# Altium PCB PCB7_main_board.PcbDoc (part 1 of 3)
Units mm, origin at the board's own origin, x right, y up, seen from the top; angles counter-clockwise.
Board outline 169 x 112 mm, 2 copper layers (Top Layer, Bottom Layer); 275 components, 203 nets, 880 pads, 376 vias.
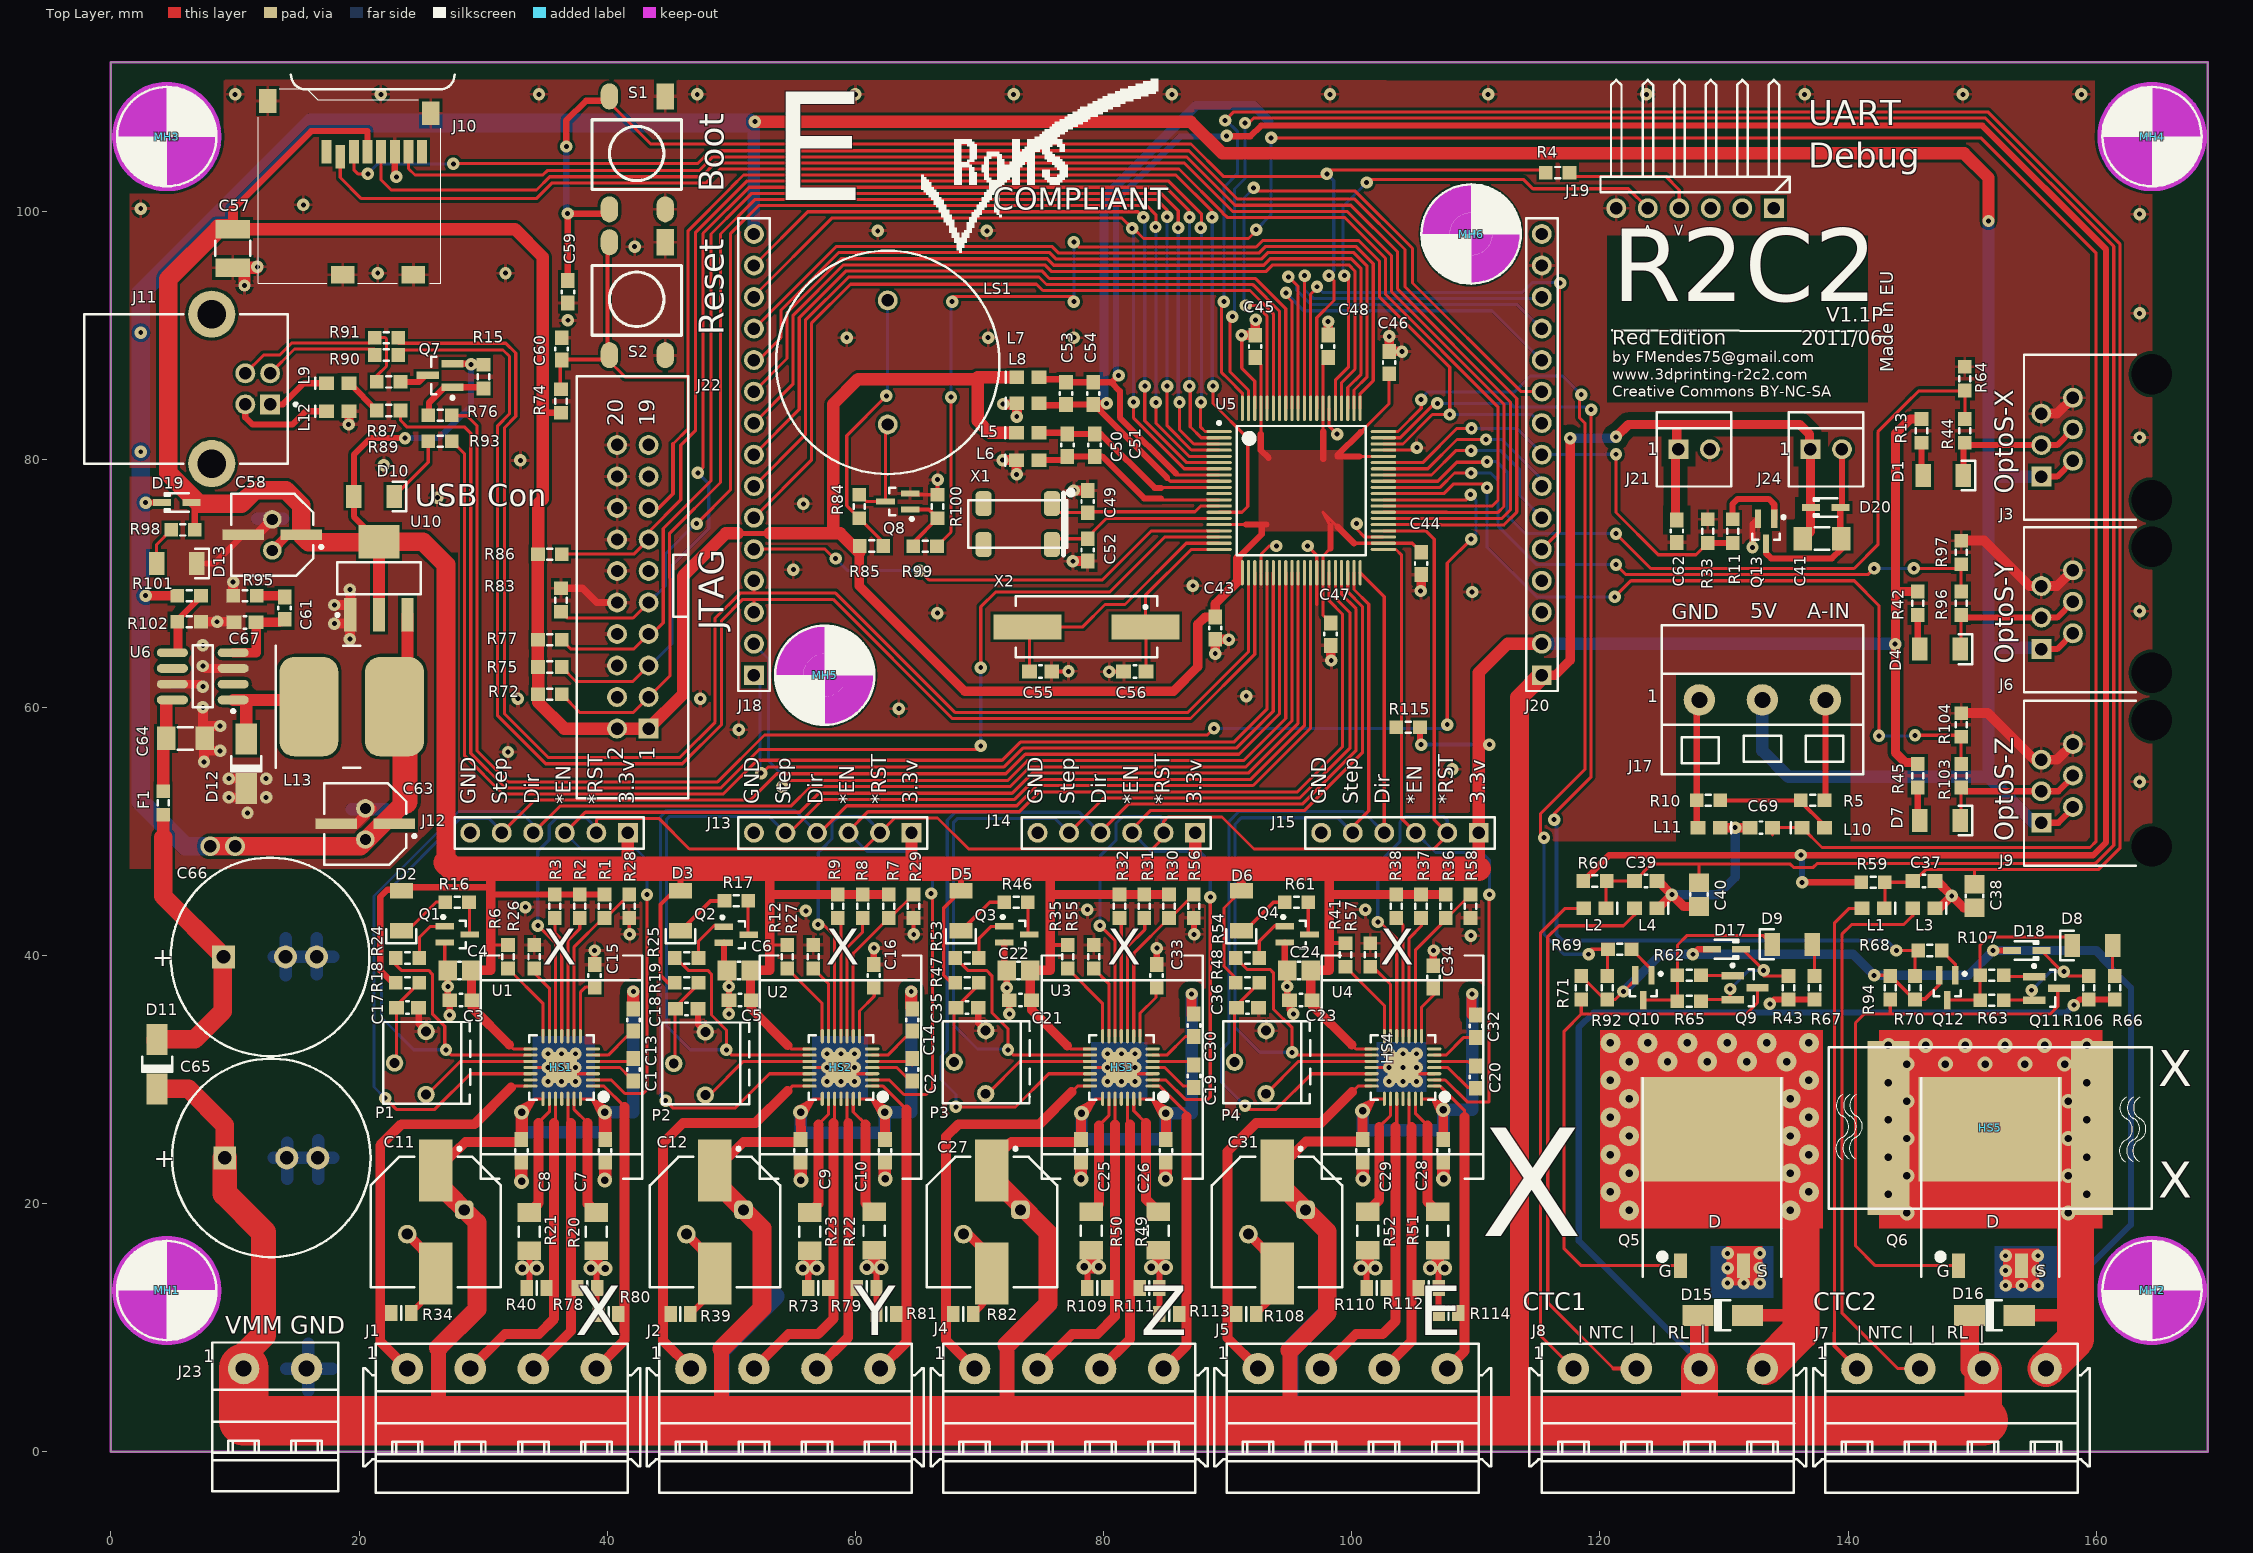
[diagram p0: Top Layer view]
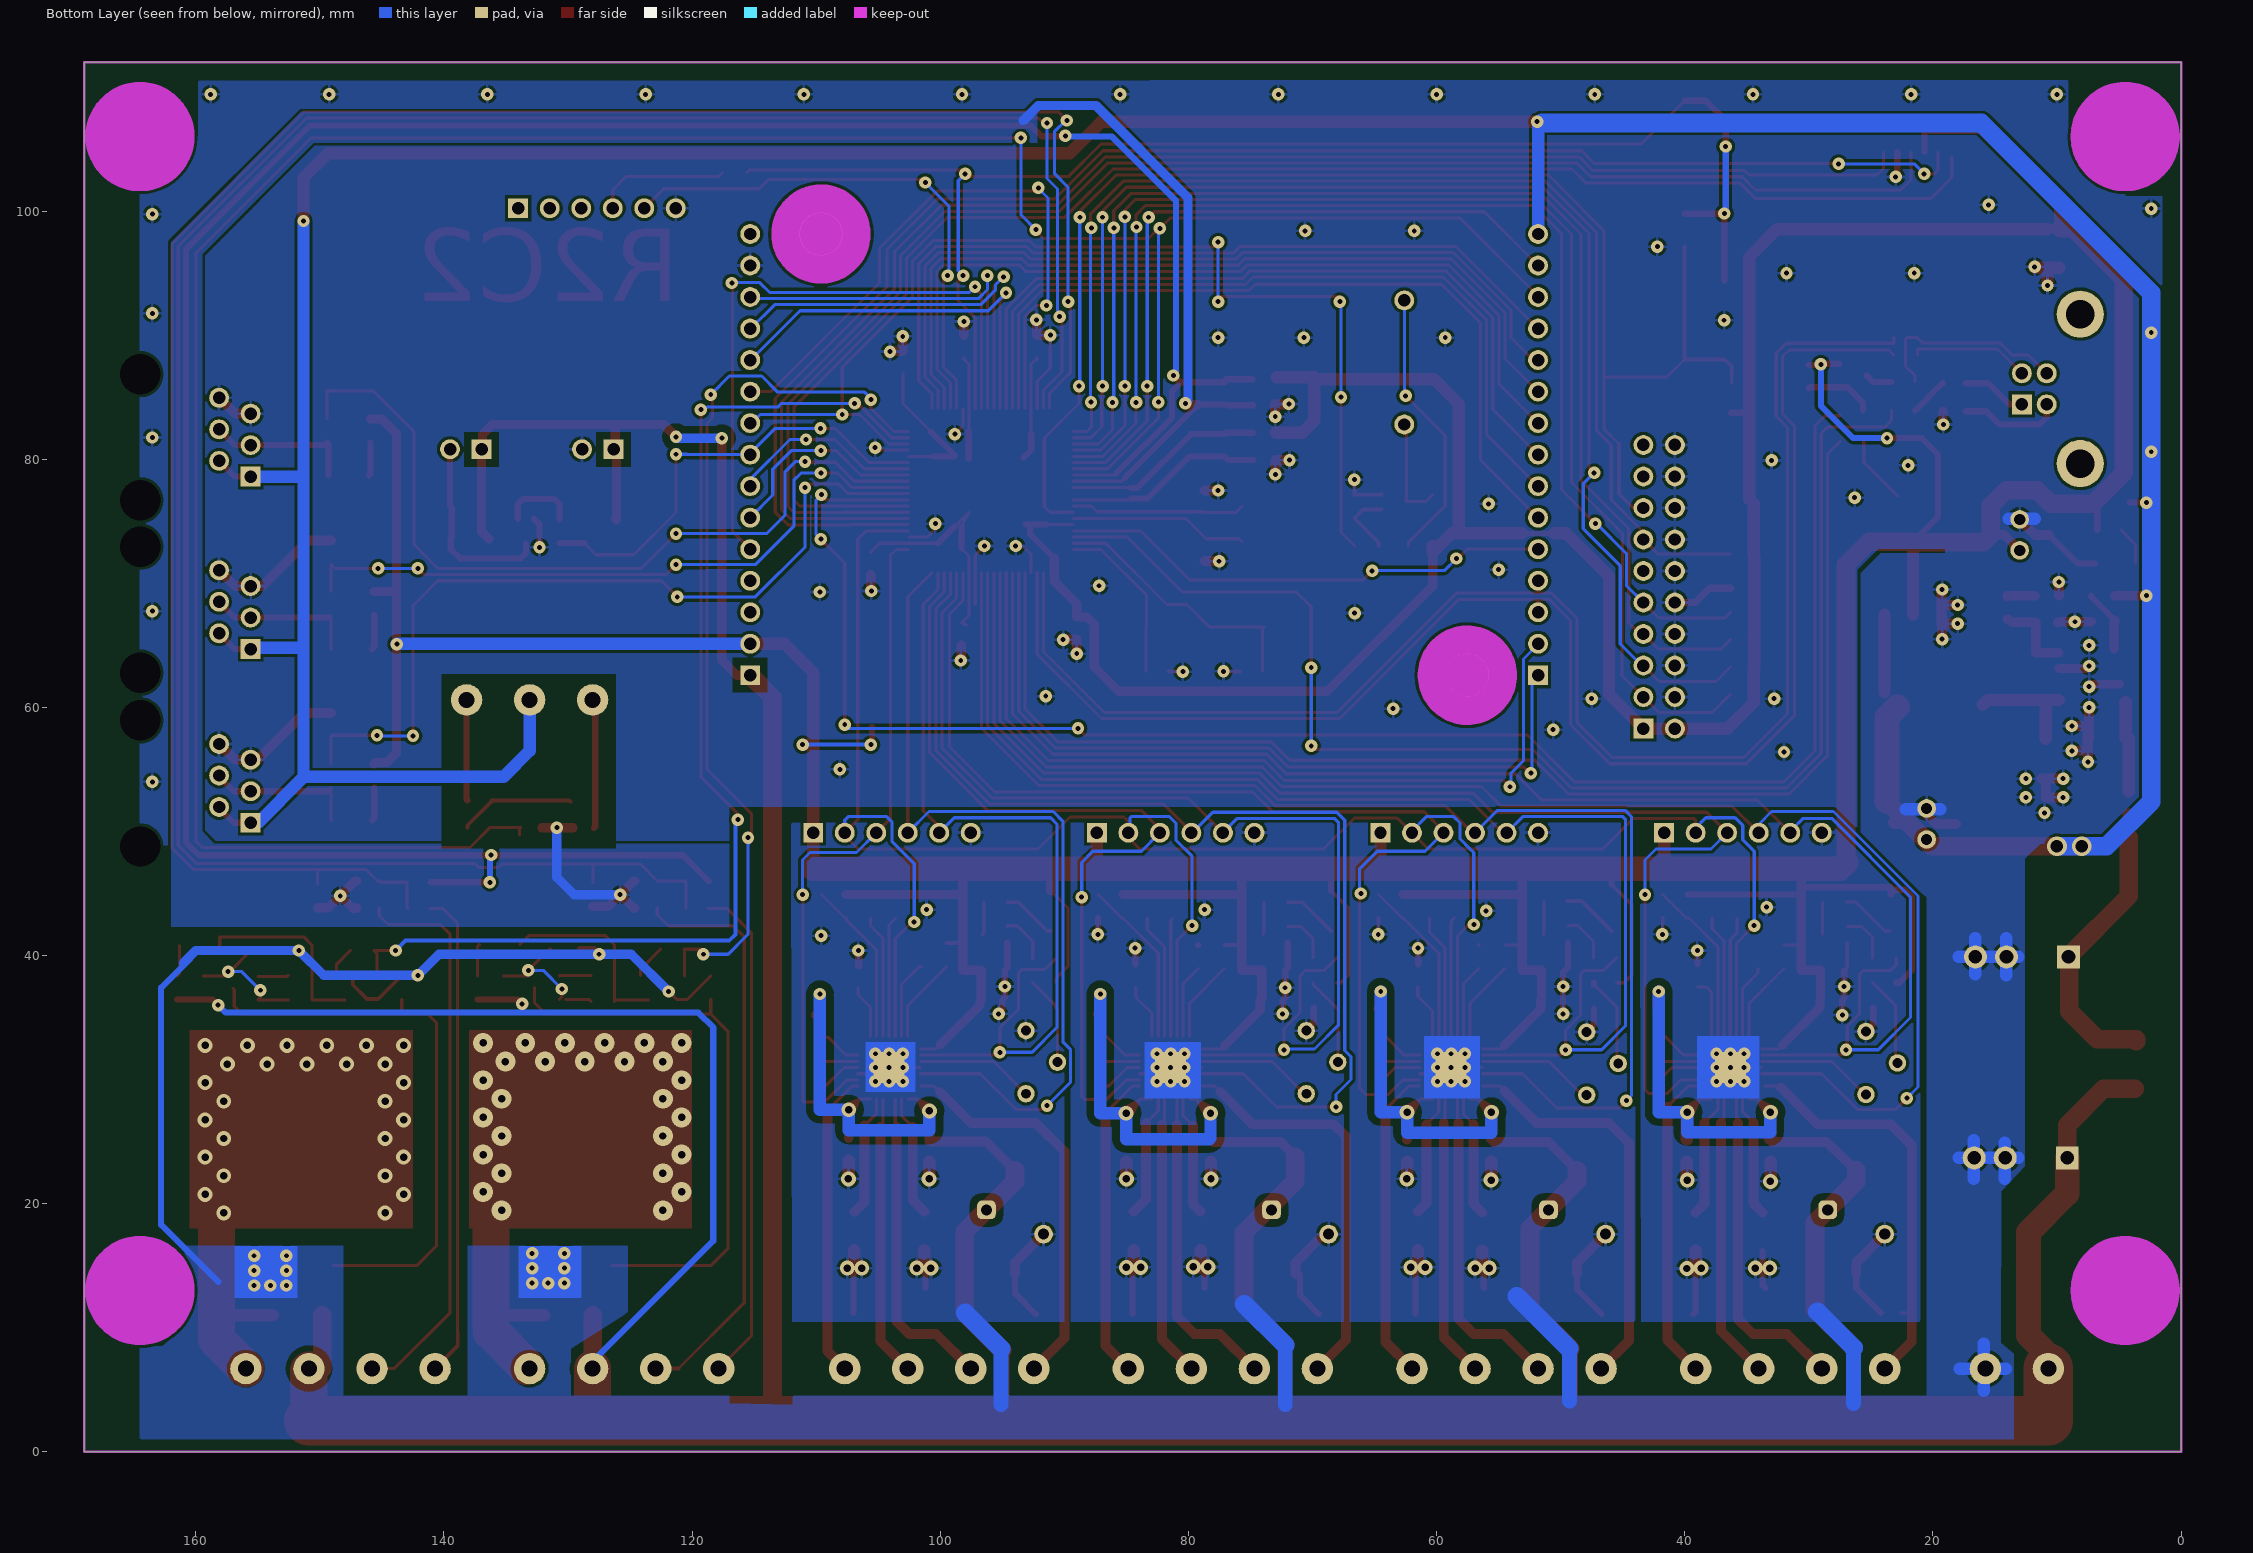
[diagram p1: Bottom Layer view, seen from below]

## Layer stack, top to bottom
Top Layer: signal copper 0.0356
Dielectric: core 0.32, FR-4, Dk 4.8
Bottom Layer: signal copper 0.0356

## Board outline
0,0 0,112 169,112 169,0

## Design rules (kind name [scope] priority, off if disabled: settings)
AssemblyTestPointUsage [All] p1 off:
AssemblyTestpoint [All] p1 off: testpointundercomponent=TRUE minsize=1.016 maxsize=2.54 preferedsize=1.524 minholesize=0 maxholesize=1.016 preferedholesize=0.813 testpointgrid=0.025 usegrid=TRUE gridtolerance=0 allowsidetop=TRUE allowsidebottom=TRUE
Clearance Clearance_1 [InNamedPolygon('Bottom_GND_USB_exeption') vs InNet('GND')] p1 off: gap=0.25
Clearance Clearance_VMM3 [InNet('NetD15_2') vs InNet('GND')] p2 off: gap=0.6
Clearance Clearance_VMM2 [InNet('NetD16_2') vs InNet('GND')] p3 off: gap=0.6
Clearance Clearance_3 [InNet('USB_D_P') vs (InNet('GND') AND OnLayer('Top Layer') AND (NOT (IsPad AND InNet('GND'))) AND (NOT(InNet('GND') AND IsTrack)))] p4 off: gap=0.76
Clearance Clearance_2 [InNet('USB_D_N') vs (InNet('GND') AND OnLayer('Top Layer') AND (NOT (IsPad AND InNet('GND'))) AND (NOT(InNet('GND') AND IsTrack)))] p5 off: gap=0.76
Clearance Clearance_VMM [InNet('VMM') vs (InNet('GND') AND (NOT (IsVia AND InNet('GND'))))] p6: gap=0.59
Clearance [All] p7: gap=0.24
ComponentClearance [All] p1 off: gap=0.254 collisioncheckmode=3 verticalgap=0.254 showdistances=FALSE
DiffPairsRouting DiffPair_USB2DiffPairsRouting [InDifferentialPair ('USB_D')] p1 off: maxlimit=0.254 minlimit=0.254 mostfreqgap=0.254 maxuncoupledlength=12.7
FabricationTestPointUsage [All] p1 off: valid=0 allowmultiple=FALSE
FabricationTestpoint [All] p1 off: side=3 testpointundercomponent=TRUE minsize=1.016 maxsize=2.54 preferedsize=1.524 minholesize=0 maxholesize=1.016 preferedholesize=0.813 testpointgrid=0.025 allowsidetop=TRUE allowsidebottom=TRUE usegrid=TRUE gridtolerance=0
FanoutControl Fanout_BGA [IsBGA] p1 off: bgadir=Out bgaviamode=Centered fanoutstyle=Auto fanoutdirection=Alternating viagrid=0.025 // Fanout_BGA (Default Rule)
FanoutControl Fanout_LCC [IsLCC] p2 off: bgadir=Out bgaviamode=Centered fanoutstyle=Auto fanoutdirection=Alternating viagrid=0.025 // Fanout_LCC (Default Rule)
FanoutControl Fanout_SOIC [IsSOIC] p3 off: bgadir=Out bgaviamode=Centered fanoutstyle=Auto fanoutdirection=Alternating viagrid=0.025 // Fanout_SOIC (Default Rule)
FanoutControl Fanout_Small [(CompPinCount < 5)] p4 off: bgadir=Out bgaviamode=Centered fanoutstyle=Auto fanoutdirection=OutThenIn viagrid=0.025 // Fanout_Small (Default Rule)
FanoutControl Fanout_Default [All] p5 off: bgadir=Out bgaviamode=Centered fanoutstyle=Auto fanoutdirection=Alternating viagrid=0.025 // Fanout_Default (Default Rule)
Height [All] p1 off: minheight=0 maxheight=30 prefheight=12.7
HoleSize [All] p1 off: absolutevalues=TRUE maxlimit=5.08 minlimit=0.4 maxpercent=80.000 minpercent=20.000
HoleToHoleClearance [All] p1 off: gap=0.254 allowstackedmicrovias=TRUE
LayerPairs [All] p1 off: enforce=TRUE
MatchedLengths DiffPair_USBMatchedLengths [InDifferentialPair ('USB_D')] p1 off: tolerance=2.54 checknetsindiffpair=TRUE checkdiffpairvsdiffpair=TRUE checkothers=TRUE
MaximumViaCount [All] p1 off: limit=300
MinimumAnnularRing [All] p1 off: minimumring=0.3
MinimumSolderMaskSliver [All] p1 off: minsoldermaskwidth=0.254
NetAntennae [All] p1 off: netantennaetolerance=0
NetsToIgnore [(InNet('V3.3') OR InNet('VA3.3') OR InNet('VMM'))] p1 off:
PasteMaskExpansion [All] p1 off: expansion=-0.1
PlaneClearance [All] p1 off: clearance=0.508
PlaneConnect [All] p1 off: planeconnectstyle=Relief reliefexpansion=0.508 reliefentries=4 reliefconductorwidth=0.3 reliefairgap=0.254
PolygonConnect No_Thermal-relif [All vs IsNamedPolygon('Bottom_GND_DCDC')] p1: connectstyle=Direct reliefconductorwidth=0.254 reliefentries=4 polygonreliefangle="90 Angle"
PolygonConnect PolygonConnect_2 [All vs IsNamedPolygon('Bottom_GND_DCDC')] p2 off: connectstyle=Direct reliefconductorwidth=0.254 reliefentries=4 polygonreliefangle="90 Angle"
PolygonConnect PolygonConnect_1 [All vs IsNamedPolygon('Bottom_GND_HeatSink')] p3 off: connectstyle=Direct reliefconductorwidth=0.254 reliefentries=4 polygonreliefangle="90 Angle"
PolygonConnect [All] p4 off: connectstyle=Relief reliefconductorwidth=0.254 reliefentries=4 polygonreliefangle="90 Angle"
RoomDefinition Sheet_1 [InComponentClass('Sheet_1')] p1 off: confinementstyle=ConfineIn formatcopy=TRUE lockcomponents=FALSE outline 172.6,0.8 203,0.8 203,6.3 172.6,6.3
RoomDefinition Sheet_2 [InComponentClass('Sheet_2')] p2 off: confinementstyle=ConfineIn formatcopy=TRUE lockcomponents=FALSE outline 172.8,11.4 203,11.4 203,7.8 172.8,7.8
RoutingCorners [All] p1 off: cornerstyle=45-Degree minsetback=2.54 maxsetback=2.54
RoutingLayers [All] p1 off: top layer_v5=TRUE bottom layer_v5=TRUE
RoutingPriority [All] p1 off: routingpriority=0
RoutingTopology [All] p1 off: topology=Shortest
RoutingVias [All] p1 off: holewidth=0.4 width=1 viastyle="Through Hole" minholewidth=0.4 minwidth=1 maxholewidth=1.6 maxwidth=2
SMDNeckDown [All] p1 off: percent=80.000
ShortCircuit [All] p1 off: allowed=FALSE
SilkToSilkClearance [All] p1 off: silktosilkclearance=0.254
SilkscreenOverComponentPads [All] p1 off: minsilkscreentomaskgap=0.254
SolderMaskExpansion [All] p1 off: expansion=0.1
Width DiffPair_Width [InDifferentialPair('USB_D')] p1 off: maxlimit=0.254 minlimit=0.24 preferedwidth=0.254
Width [All] p2: maxlimit=5 minlimit=0.24 preferedwidth=0.25 checkconnectedcopper=TRUE
1 further rules are at their usual default settings.

## Classes and differential pairs
component class Sheet_2: C28 C33 C35 C36 C41 C43 C44 C45 C46 C47 C49 C50 C51 C52 C54 C57 C58 C59 C60 C61 C63 C64 C65 C66 C67 D10 D11 D12 D13 D19 D20 F1 J10 J11 J18 J19 J20 J22 J23 J24 L5 L6 L7 L8 L9 L12 L13 LS1 MH1 MH2 MH3 MH4 MH5 MH6 Q7 Q8 Q13 R4 R11 R15 R33 R72 R74 R75 R76 R77 R83 R84 R85 R86 R87 R89 R90 R91 R93 R95 R98 R99 R100 R101 R102 R115 S1 S2 U5 U6 U10 X1 X2
component class Sheet_1: C1 C2 C3 C4 C5 C6 C7 C8 C9 C10 C11 C12 C13 C14 C15 C16 C17 C18 C19 C20 C21 C22 C23 C24 C25 C26 C27 C28 C29 C30 C31 C32 C33 C34 C35 C36 C37 C38 C39 C40 C42 C62 C68 C69 C70 D1 D2 D3 D4 D5 D6 D7 D8 D9 D14 D15 D16 D17 D18 HS1 HS2 HS3 HS4 HS5 J1 J2 J3 J4 J5 J6 J7 J8 J9 J12 J13 J14 J15 J16 J17 J21 L1 L2 L3 L4 L10 L11 MH7 P1 P2 P3 P4 Q1 Q2 Q3 Q4 Q5 Q6 Q9 Q10 Q11 Q12 R1 R2 R3 R5 R6 R7 R8 R9 R10 R12 R13 R14 R16 R17 R18 R19 R20 R21 R22 R23 R24 R25 R26 R27 R28 R29 R30 R31 R32 R34 R35 R36 R37 R38 R39 R40 R41 R42 R43 R44 R45 R46 R47 R48 R49 R50 R51 R52 R53 R54 R55 R56 R57 R58 R59 R60 R61 R62 R63 R64 R65 R66 R67 R68 R69 R70 R71 R73 R78 R79 R80 R81 R82 R88 R92 R94 R96 R97 R103 R104 R105 R106 R107 R108 R109 R110 R111 R112 R113 R114 R? U1 U2 U3 U4 U7 U8
differential pair USB_D: +USB_D_P -USB_D_N

## Components (designator, comment, footprint, x,y, rotation, side; value= is the part's Value field where it differs from the comment)
C1 "100nF" CAPC1608M 42.1,30.8 r270 top locked
C2 "100nF" CAPC1608M 64.578,30.8 r90 top
C3 "100nF" CAPC1608M 28.2,36.4 r0 top locked
C4 "10uF 6.3V" CAPC2012M 28.1,38.8 r0 top locked
C5 "100nF" CAPC1608M 50.7,36.4 r0 top
C6 "10uF 6.3V" CAPC2012M 50.6,38.8 r0 top
C7 "100nF" CAPC1608M 39.828,24.27 r270 top locked
C8 "100nF" CAPC1608M 33.078,24.27 r90 top locked
C9 "100nF" CAPC1608M 55.578,24.27 r90 top
C10 "100nF" CAPC1608M 62.378,24.27 r90 top
C11 "100uF 50V" CAPAE100X100M 26.178,18.52 r270 top locked
C12 "100uF 50V" CAPAE100X100M 48.678,18.52 r270 top
C13 "100nF" CAPC1608M 42.1,34.8 r90 top locked
C14 "100nF" CAPC1608M 64.578,34.8 r90 top
C15 "220nF" CAPC1608M 38.978,38.37 r270 top locked
C16 "220nF" CAPC1608M 61.478,38.37 r270 top
C17 "100nF" CAPC1608M 23.9,35.8 r180 top locked
C18 "100nF" CAPC1608M 46.4,35.7 r0 top
C19 "100nF" CAPC1608M 87.278,30.27 r270 top
C20 "100nF" CAPC1608M 110,30.2 r90 top
C21 "100nF" CAPC1608M 73.3,36.4 r0 top
C22 "10uF 6.3V" CAPC2012M 73.15,38.8 r0 top
C23 "100nF" CAPC1608M 95.9,36.4 r0 top
C24 "10uF 6.3V" CAPC2012M 95.75,38.8 r0 top
C25 "100nF" CAPC1608M 78.178,24.27 r90 top
C26 "100nF" CAPC1608M 85.02,24.27 r90 top
C27 "100uF 50V" CAPAE100X100M 71,18.52 r270 top
C28 "100nF" CAPC1608M 107.378,24.27 r90 top
C29 "100nF" CAPC1608M 100.878,24.27 r90 top
C30 "100nF" CAPC1608M 87.278,34.37 r90 top
C31 "100uF 50V" CAPAE100X100M 93.978,18.52 r270 top
C32 "100nF" CAPC1608M 110,34.3 r90 top
C33 "220nF" CAPC1608M 84.278,38.37 r270 top
C34 "220nF" CAPC1608M 106.578,38.27 r270 top
C35 "100nF" CAPC1608M 69,35.8 r180 top
C36 "100nF" CAPC1608M 91.6,35.8 r180 top
C37 "100nF" CAPC1608M 146.12,46 r180 top
C38 "10uF 6.3V" CAPC2012M 150.2,44.8 r90 top
C39 "100nF" CAPC1608M 123.7,46 r180 top
C40 "10uF 6.3V" CAPC2012M 128,44.9 r90 top
C41 "10uF 35V" CAPC3216M 137.9,73.6 r180 top
C43 "100nF" CAPC1608M 89,66.388 r90 top
C44 "100nF" CAPC1608M 105.6,71.6 r90 top
C45 "100nF" CAPC1608M 92.22,89.088 r90 top
C46 "100nF" CAPC1608M 103.02,87.788 r90 top
C47 "100nF" CAPC1608M 98.3,65.9 r270 top
C48 "100nF" CAPC1608M 98.1,89.1 r90 top
C49 "22pF" CAPC1608M 78.72,76.588 r90 top
C50 "1nF" CAPC1608M 77.082,81.126 r90 top
C51 "10nF" CAPC1608M 79.282,81.126 r90 top
C52 "22pF" CAPC1608M 78.72,72.688 r270 top
C53 "1nF" CAPC1608M 76.968,85.3 r90 top
C54 "10nF" CAPC1608M 79.168,85.3 r90 top
C55 "22pF" CAPC1608M 74.92,62.888 r0 top
C56 "22pF" CAPC1608M 82.52,62.888 r180 top
C57 "47uF 6.3V" CAPC3225M 9.82,96.988 r90 top
C58 "100uF 10V" CAPAE6666X54M#1 13,73.9 r180 top
C59 "100nF" CAPC1608M 36.82,93.488 r90 top
C60 "100nF" CAPC1608M 36.32,88.888 r270 top
C61 "22nF" CAPC1608M 14,68 r270 top
C62 "100nF" CAPC1608M 126.2,74.2 r90 top
C63 "100uF 10V" CAPAE6666X54M#2 20.5,50.6 r180 top
C64 "10uF 35V" CAPC3216M 6,57.5 r180 top
C65 "2200uF 35V" CAPPR7.5-16X25 12.92,23.688 r0 top
C66 "2200uF 35V" CAPPR7.5-16X25 12.82,39.888 r0 top
C67 "220pF" CAPC1608M 10.8,66.85 r0 top
C69 "100nF" CAPC1608M 133,50.3 r0 top
D1 "Green" LEDM_3216X12M 147.67,78.688 r180 top
D2 "Red" LEDM_3216X12M 23.4,43.6 r90 top locked
D3 "Red" LEDM_3216X12M 45.9,43.6 r90 top
D4 "Green" LEDM_3216X12M 147.42,64.688 r180 top
D5 "Red" LEDM_3216X12M 68.5,43.6 r90 top
D6 "Red" LEDM_3216X12M 91.1,43.6 r90 top
D7 "Green" LEDM_3216X12M 147.42,50.888 r180 top
D8 "Red" LEDM_3216X12M 159.7,40.8 r0 top
D9 "Red" LEDM_3216X12M 135.5,40.9 r0 top
D10 "Blue" LEDM_3216X12M 21.2,77 r180 top
D11 "60V@1.5A" SMA 3.72,31.248 r90 top
D12 "25V@2A" SMB 10.9,55.45 r90 top
D13 "Orange" LEDM_3216X12M 5.3,71.6 r180 top
D15 "60V@1.5A" SMA 129.9,11 r0 top
D16 "60V@1.5A" SMA 151.8,11 r0 top
D17 "12V" SOD323 130.2,40.5 r180 top
D18 "12V" SOD323 154.4,40.4 r180 top
D19 "1A@30V" SOD323 5.3,76.5 r0 top
D20 "1A@30V" SOD323 138.2,76.1 r0 top
F1 "3.15A" RESC1608M 4.2,52.3 r90 top
HS1 "Mec_Heat_Sink" HS_180X130X50 36.3,31 r90 top locked
HS2 "Mec_Heat_Sink" HS_180X130X50 58.8,31 r90 top locked
HS3 "Mec_Heat_Sink" HS_180X130X50 81.5,31 r90 top locked
HS4 "Mec_Heat_Sink" HS_180X130X50 104.1,31 r90 top locked
HS5 "Mec_Heat_Sink" FK_244_13_D2PAK 151.46,26.1 r180 top
J1 "Con 4" WEIDMULLER_SL-5.08-04-90B 31.5,6.708 r0 top locked
J2 "Con 4" WEIDMULLER_SL-5.08-04-90B 54.36,6.708 r0 top locked
J3 "RJ11" MOLEX_95022-2667 160.028,81.77 r90 top
J4 "Con 4" WEIDMULLER_SL-5.08-04-90B 77.22,6.708 r0 top locked
J5 "Con 4" WEIDMULLER_SL-5.08-04-90B 100.08,6.708 r0 top locked
J6 "RJ11" MOLEX_95022-2667 160.028,67.87 r90 top
J7 "Con 4" WEIDMULLER_SL-5.08-04-90B 148.34,6.708 r0 top locked
J8 "Con 4" WEIDMULLER_SL-5.08-04-90B 125.48,6.708 r0 top locked
J9 "RJ11" MOLEX_95022-2667 160.028,53.87 r90 top
J10 "uSD" 3M_2900 19.203,101.87 r0 top locked
J11 "Con 4 USB" USB2.5-2H4D 11.828,85.67 r180 top locked
J12 "HDR1X6H" HDR1X6 41.66,49.888 r180 top locked
J13 "HDR1X6H" HDR1X6 64.52,49.888 r180 top locked
J14 "HDR1X6H" HDR1X6 87.38,49.888 r180 top locked
J15 "HDR1X6H" HDR1X6 110.24,49.888 r180 top locked
J17 "Con 3" phoenix-contact_smkdsn-5.08 133.1,60.6 r0 top
J18 "Con 15" HDR1X15 51.82,62.588 r90 top
J19 "HDR1X6H" HDR1X6H 134.02,100.228 r180 top
J20 "Con 15" HDR1X15 115.32,62.588 r90 top
J21 "Con 2" MOLEX_22-29-2021 127.6,80.8 r0 top
J22 "2x10x2.54mm" HDR2X10 43.33,58.288 r90 top
J23 "Con 2" WEIDMULLER_SL-5.08-02-90B 13.228,6.708 r0 top locked
J24 "Con 2" MOLEX_22-29-2021 138.24,80.8 r0 top
L1 "470R@100Mhz" INDC1608M 142.02,43.8 r180 top
L2 "470R@100Mhz" INDC1608M 119.6,43.8 r180 top
L3 "470R@100Mhz" INDC1608M 146.12,43.8 r180 top
L4 "470R@100Mhz" INDC1608M 123.7,43.8 r180 top
L5 "470R@100Mhz" INDC1608M 73.882,82.126 r0 top
L6 "470R@100Mhz" INDC1608M 73.882,79.926 r0 top
L7 "470R@100Mhz" INDC1608M 73.9,86.6 r0 top
L8 "470R@100Mhz" INDC1608M 73.9,84.5 r0 top
L9 "470R@100Mhz" INDC1608M 18.278,86.12 r0 top
L10 "470R@100Mhz" INDC1608M 137.2,50.3 r0 top
L11 "470R@100Mhz" INDC1608M 128.8,50.3 r180 top
L12 "470R@100Mhz" INDC1608M 18.278,83.87 r0 top
L13 "33uH 1.5Adc" INDP9898X58M 19.4,60.05 r0 top
LS1 "Buzzer" TDK_PS17 62.6,92.8 r270 top
MH1 "MH" MH_M3 4.5,13 r0 top locked
MH2 "MH" MH_M3 164.5,13 r90 top locked
MH3 "MH" MH_M3 4.5,106 r90 top locked
MH4 "MH" MH_M3 164.5,106 r0 top locked
MH5 "MH" MH_M3_2 57.52,62.588 r270 top locked
MH6 "MH" MH_M3_2 109.62,98.148 r90 top locked
P1 "10k" TRIMMER_14 25.4,31.34 r270 top locked
P2 "10k" TRIMMER_14 47.9,31.3 r270 top
P3 "10k" TRIMMER_14 70.5,31.4 r270 top
P4 "10k" TRIMMER_14 93.1,31.4 r270 top
Q1 "N" SOT323-3AM 27.9,41.7 r0 top locked
Q2 "N" SOT323-3AM 50.4,41.67 r0 top
Q3 "N" SOT323-3AM 73,41.7 r0 top
Q4 "N" SOT323-3AM 95.6,41.7 r0 top
Q5 "N" D2PAK 129.04,26 r0 top
Q6 "N" D2PAK 151.46,26 r0 top
Q7 "P" SOT23-3M 26.52,86.748 r180 top
Q8 "N" SOT323-3AM 63.42,76.588 r180 top
Q9 "P" SOT23-3M 131.7,37.4 r0 top
Q10 "N" SOT323-3AM 123.5,37.4 r270 top
Q11 "P" SOT23-3M 156,37.35 r0 top
Q12 "N" SOT323-3AM 148,37.4 r270 top
Q13 "N" SOT323-3AM 133.4,74.2 r270 top
R1 "10K" RESC1608M 39.778,43.97 r90 top locked
R2 "10K" RESC1608M 37.778,43.97 r90 top locked
R3 "10K" RESC1608M 35.778,43.97 r90 top locked
R4 "1K5" RESC1608M 116.6,103.1 r0 top
R5 "6K8" RESC1608M 137.15,52.5 r0 top
R6 "10K" RESC1608M 32,39.9 r90 top locked
R7 "10K" RESC1608M 62.678,43.97 r90 top
R8 "10K" RESC1608M 60.578,43.97 r90 top
R9 "10K" RESC1608M 58.578,43.97 r90 top
R10 "10K" RESC1608M 128.75,52.5 r180 top
R11 "100R" RESC1608M 130.7,74.2 r90 top
R12 "10K" RESC1608M 54.5,39.9 r90 top
R13 "274R" RESC1608M 145.92,82.288 r90 top
R15 "1M" RESC1608M 30.02,86.648 r90 top
R16 "274R" RESC1608M 27.9,44.3 r180 top locked
R17 "274R" RESC1608M 50.4,44.4 r180 top
R18 "39K" RESC1608M 23.9,37.8 r180 top locked
R19 "39K" RESC1608M 46.4,37.8 r180 top
R20 "0R047" RESC3216M 39.12,17.738 r90 top locked
R21 "0R047" RESC3216M 33.72,17.738 r90 top locked
R22 "0R047" RESC3216M 61.5,17.8 r90 top
R23 "0R047" RESC3216M 56.32,17.738 r90 top
R24 "100K" RESC1608M 23.9,39.8 r180 top locked
R25 "100K" RESC1608M 46.4,39.8 r180 top
R26 "10K" RESC1608M 34.1,39.9 r270 top locked
R27 "10K" RESC1608M 56.6,39.9 r270 top
R28 "100K" RESC1608M 41.778,43.97 r90 top locked
R29 "100K" RESC1608M 64.678,43.97 r90 top
R30 "10K" RESC1608M 85.278,43.97 r90 top
R31 "10K" RESC1608M 83.278,43.97 r90 top
R32 "10K" RESC1608M 81.278,43.97 r90 top
R33 "10K" RESC1608M 128.7,74.2 r270 top
R34 "6k8" RESC2012L 23.4,11.2 r0 top
R35 "10K" RESC1608M 77.1,39.9 r90 top
R36 "10K" RESC1608M 107.578,43.97 r90 top
R37 "10K" RESC1608M 105.578,43.97 r90 top
R38 "10K" RESC1608M 103.578,43.97 r90 top
R39 "6k8" RESC2012L 45.9,11.1 r0 top
R40 "6k8" RESC2012L 34.3,13.2 r180 top
R41 "10K" RESC1608M 99.5,40.05 r90 top
R42 "274R" RESC1608M 145.62,68.388 r90 top
R43 "1K5" RESC1608M 135.2,37.4 r270 top
R44 "6K8" RESC1608M 149.42,82.288 r90 top
R45 "274R" RESC1608M 145.62,54.488 r90 top
R46 "274R" RESC1608M 72.95,44.3 r180 top
R47 "39K" RESC1608M 69,37.8 r180 top
R48 "39K" RESC1608M 91.6,37.8 r180 top
R49 "0R047" RESC3216M 84.42,17.8 r90 top
R50 "0R047" RESC3216M 79.02,17.8 r90 top
R51 "0R047" RESC3216M 106.92,17.8 r90 top
R52 "0R047" RESC3216M 101.278,17.8 r90 top
R53 "100K" RESC1608M 69,39.8 r180 top
R54 "100K" RESC1608M 91.6,39.8 r180 top
R55 "10K" RESC1608M 79.2,39.9 r270 top
R56 "100K" RESC1608M 87.278,43.97 r90 top
R57 "10K" RESC1608M 101.5,40.05 r270 top
R58 "100K" RESC1608M 109.578,43.97 r90 top
R59 "10K" RESC1608M 142.02,45.9 r180 top
R60 "274R" RESC1608M 119.6,46 r180 top
R61 "274R" RESC1608M 95.55,44.3 r180 top
R62 "100R" RESC1608M 127.2,38.4 r0 top
R63 "100K" RESC1608M 151.6,36.4 r0 top
R64 "10K" RESC1608M 149.42,86.488 r270 top
R65 "100K" RESC1608M 127.2,36.3 r0 top
R66 "4K7" RESC1608M 161.5,37.4 r270 top
R67 "4K7" RESC1608M 137.3,37.4 r270 top
R68 "100R" RESC1608M 146.6,40.4 r0 top
R69 "100R" RESC1608M 121.6,40.5 r0 top
R70 "10K" RESC1608M 145.4,37.4 r90 top
R71 "10K" RESC1608M 118.5,37.4 r270 top
R72 "10K" RESC1608M 35.37,61.048 r0 top
R73 "6k8" RESC2012L 57,13.2 r180 top
R74 "100K" RESC1608M 36.27,84.688 r270 top
R75 "10K" RESC1608M 35.37,63.248 r0 top
R76 "10K" RESC1608M 26.52,83.548 r0 top
R77 "10K" RESC1608M 35.37,65.448 r0 top
R78 "6k8" RESC2012L 38.4,13.2 r0 top
R79 "6k8" RESC2012L 60.9,13.2 r0 top
R80 "6k8" RESC2012L 40.1,11.1 r180 top
R81 "6k8" RESC2012L 62.5,11.1 r180 top
R82 "6k8" RESC2012L 68.7,11.1 r0 top
R83 "10K" RESC1608M 36.27,68.648 r270 top
R84 "1K5" RESC1608M 60.32,76.188 r270 top
R85 "1K5" RESC1608M 61.3,73 r180 top
R86 "10K" RESC1608M 35.37,72.348 r0 top
R87 "1K5" RESC1608M 22.38,86.228 r0 top
R89 "10K" RESC1608M 22.38,83.92 r0 top
R90 "33R" RESC1608M 22.2,88.4 r0 top
R91 "33R" RESC1608M 22.2,89.8 r0 top
R92 "10K" RESC1608M 120.6,37.4 r90 top
R93 "680R" RESC1608M 26.52,81.448 r180 top
R94 "10K" RESC1608M 143.4,37.4 r270 top
R95 "4K7" RESC1608M 10.8,69 r0 top
R96 "6K8" RESC1608M 149.12,68.388 r90 top
R97 "10K" RESC1608M 149.12,72.488 r270 top
R98 "680R" RESC1608M 5.8,74.3 r0 top
R99 "100K" RESC1608M 65.62,72.988 r180 top
R100 "1M" RESC1608M 66.62,76.188 r270 top
R101 "6k8 1%" RESC1608M 6.3,69 r180 top
R102 "2k2 1%" RESC1608M 6.3,66.9 r180 top
R103 "6K8" RESC1608M 149.12,54.488 r90 top
R104 "10K" RESC1608M 149.12,58.588 r270 top
R106 "1K5" RESC1608M 159.4,37.4 r270 top
R107 "100R" RESC1608M 151.6,38.4 r0 top
R108 "6k8" RESC2012L 91.5,11.1 r0 top
R109 "6k8" RESC2012L 79.5,13.2 r180 top
R110 "6k8" RESC2012L 102,13.2 r180 top
R111 "6k8" RESC2012L 83.7,13.2 r0 top
R112 "6k8" RESC2012L 106.2,13.2 r0 top
R113 "6k8" RESC2012L 85.3,11.1 r180 top
R114 "6k8" RESC2012L 107.8,11.2 r180 top
R115 "10K" RESC1608M 104.55,58.4 r180 top
S1 "SW-PB" SW_FSM6JSMA 42.42,104.688 r270 top
S2 "SW-PB" SW_FSM6JSMA 42.42,92.936 r270 top
U1 "A4988" QFN50P500X500X100-28M 36.328,30.97 r180 top locked
U2 "A4988" QFN50P500X500X100-28M 58.828,30.97 r180 top
U3 "A4988" QFN50P500X500X100-28M 81.428,30.97 r180 top
U4 "A4988" QFN50P500X500X100-28M 104.128,30.97 r180 top
U5 "IC LPC175x" TSQFP50P1400X1400X160-80M 95.932,77.476 r0 top
U6 "IC L5970D" SOIC127P600-8M 7.4,62.5 r180 top
U10 "LDO" SOT223-4M 21.6,70.4 r90 top
X1 "32.768KHz" XTAL_800P380X250-4M 73.082,74.776 r270 top
X2 "12MHz" HC49/4H_SMX 78.62,66.488 r180 top

## Footprints (in the part's own frame and the unit in brackets; to place one, negate y for a bottom-side part, rotate by r counter-clockwise, add the part's x,y. Pads: shape width x height; smd on the part's side, far side on the other; paste and mask are expansions set on the pad)
3M_2900 [mm] "Connector; USB2.0, Type B, SM; 5 Position; Right Angle"
  rect 0.8x1.9 smd: 1(-1.825,2.9) 2(-0.725,2.5) 3(0.375,2.9) 4(1.475,2.9) 5(2.575,2.9) 6(3.675,2.9) 7(4.775,2.9) 8(5.875,2.9)
  rect 1.4x1.9 smd: 9(-6.575,7) 9(6.575,6)
  rect 1.9x1.4 smd: 9(-0.525,-7) 9(5.175,-7)
  silkscreen extent -7.32,-7.7 7.38,8
CAPAE100X100M [mm] "Capacitors, Aluminum Electrolytic, 2-Leads, Body 10x10mm, IPC Low Density"
  rect 5x2.7 smd: 1(-4.15,0) 2(4.15,0)
  rrect50% 1.5x1.5 hole 0.9: 1(-0.98,2.3)
  round 1.5 hole 0.9: 2(0.98,-2.3)
  silkscreen extent -6.02,-5.25 5.25,5.25, body extent -5.25,-5.25 5.25,5.25, height 10
CAPAE6666X54M#1 [mm] "SMT Aluminum Electrolytic Capacitor, 2-Leads, Body 6.6x6.6x5.4mm, IPC Low Density"
  rect 3.35x0.85 smd: 1(-2.325,0) 2(2.355,0)
  round 1.5 hole 0.9: 1(0,1.25) 2(0,-1.25)
  Top Layer lines w0.8: 2.355,0 1.25,0
  silkscreen extent -4.08,-3.3 3.3,3.3, body extent -3.3,-3.3 3.3,3.3, height 5.4
CAPAE6666X54M#2 [mm] "SMT Aluminum Electrolytic Capacitor, 2-Leads, Body 6.6x6.6x5.4mm, IPC Low Density"
  rect 3.35x0.85 smd: 1(-2.325,0) 2(2.355,0)
  round 1.5 hole 0.9: 1(0,1.25) 2(0,-1.25)
  Top Layer lines w0.8: 2.355,0 1.3,0 1.25,0 ; 1.25,0 1.25,0
  silkscreen extent -4.08,-3.3 3.3,3.3, body extent -3.3,-3.3 3.3,3.3, height 5.4
CAPC1608M [mm] "Chip Capacitor, Body 1.6x0.8mm, IPC Low Density"
  rect 1.2x1.1 smd: 1(-0.9,0) 2(0.9,0)
  silkscreen extent -0.1,-0.5 0.1,0.5, body extent -0.87,-0.48 0.87,0.48, height 0.85
CAPC2012M [mm] "Chip Capacitor, Body 2.0x1.3mm, IPC Low Density"
  rect 1.5x1.6 smd: 1(-0.95,0) 2(0.95,0)
  silkscreen extent -0.1,-0.7 0.1,0.7, body extent -1.1,-0.72 1.1,0.72, height 1.1
CAPC3216M [mm] "Chip Capacitor, Body 3.2x1.6mm, IPC Low Density"
  rect 1.5x1.9 smd: 1(-1.55,0) 2(1.55,0)
  silkscreen extent -0.6,-0.9 0.6,0.9, body extent -1.7,-0.9 1.7,0.9, height 1.35
CAPC3225M [mm] "Chip Capacitor, Body 3.2x2.5mm, IPC Low Density"
  rect 1.5x2.8 smd: 1(-1.55,0) 2(1.55,0)
  silkscreen extent -0.6,-1.4 0.6,1.4, body extent -1.7,-1.35 1.7,1.35, height 1.35
CAPPR7.5-16X25 [mm] "Capacitor, Electrolytic, Radial; Body 16 x 25 mm (Dia.xH typ); Pin Spacing 7.5 mm (typ)"
  rect 1.85x1.85 hole 1.1: 1(-3.75,0)
  round 1.85 hole 1.1: 2(1.25,0) 2(3.75,0)
  silkscreen extent -8,-8 8,8
D2PAK [mm] "D2-PAK/TO-263-AB; 3 Leads (1 Cropped); Body 15.5 (inc. leads) x 10.5 mm (LxW max)"
  rect 1.05x2 smd: 1(-2.54,-11) 3(2.54,-11)
  rect 11.55x8.4 smd: 2(0,0)
  silkscreen extent -5.58,-11.9 5.58,4.1
FK_244_13_D2PAK [mm]
  rect 3.4x14 smd paste-0.7: A(-8.2,0) K(8.2,0)
  silkscreen extent -13,-6.5 13,6.5
HC49/4H_SMX [mm] "Quartz Crystal, SM; Body 13.4 (inc. leads) x 4.9 mm (LxW max)"
  rect 5.5x2 smd: 1(-4.75,0) 2(4.75,0)
  silkscreen extent -5.7,-2.45 5.7,2.45
HDR1X6 [mm] "Connector; Header; 6 Position"
  rect 1.6x1.6 hole 1: 1(0,0)
  round 1.6 hole 1: 2(2.54,0) 3(5.08,0) 4(7.62,0) 5(10.16,0) 6(12.7,0)
  silkscreen extent -1.27,-1.27 13.97,1.27
HDR1X6H [mm]
  rect 1.6x1.6 hole 1: 1(0,0)
  round 1.6 hole 1: 2(2.54,0) 3(5.08,0) 4(7.62,0) 5(10.16,0) 6(12.7,0)
  silkscreen extent -1.27,-10.35 13.97,-1.27
HDR1X15 [mm] "Connector; Header; 15 Position"
  rect 1.6x1.6 hole 1: 1(0,0)
  round 1.6 hole 1: 2(2.54,0) 3(5.08,0) 4(7.62,0) 5(10.16,0) 6(12.7,0) 7(15.24,0) 8(17.78,0) 9(20.32,0) 10(22.86,0) 11(25.4,0) 12(27.94,0) 13(30.48,0) 14(33.02,0) 15(35.56,0)
  silkscreen extent -1.27,-1.27 36.83,1.27
HDR2X10 [mm] "Connector; Header; 10x2 Position"
  rect 1.6x1.6 hole 1: 1(0,0)
  round 1.6 hole 1: 2(0,2.54) 3(2.54,0) 4(2.54,2.54) 5(5.08,0) 6(5.08,2.54) 7(7.62,0) 8(7.62,2.54) 9(10.16,0) 10(10.16,2.54) 11(12.7,0) 12(12.7,2.54) 13(15.24,0) 14(15.24,2.54) 15(17.78,0) 16(17.78,2.54) 17(20.32,0) 18(20.32,2.54) 19(22.86,0) 20(22.86,2.54)
  silkscreen extent -5.6,-3.2 28.4,5.8
HS_180X130X50 [mm]
  silkscreen extent -9,-6.5 9,6.5
INDC1608M [mm] "Chip Inductor, Body 1.6x0.8mm, IPC Low Density"
  rect 1.2x1.1 smd: 1(-0.9,0) 2(0.9,0)
  silkscreen extent -1.8,-0.45 -1.8,0.45, body extent -0.87,-0.48 0.87,0.48, height 0.71
INDP9898X58M [mm] "Precision Wire Wound Inductor, 2-Leads, Body 9.8x9.8mm, IPC Low Density"
  rrect50% 4.75x8 smd: 1(-3.45,0) 2(3.45,0)
  silkscreen extent -6.13,-4.9 0.67,4.9, body extent -4.9,-4.9 4.9,4.9, height 5.8
LEDM_3216X12M [mm] "Led Chip(1206) 2 Leads, Body 3,2x1,6mm, IPC Low Density"
  rect 1.25x1.85 smd: 1(-1.625,0) 2(1.625,0)
  silkscreen extent -2.6,-1.2 -1.5,1.2, body extent -1.65,-0.85 1.65,0.85, height 1.2
MH_M3 [mm] "Mounting Hole"
  round 0 hole 3.5 unplated: 0(0,0)
  Keep-Out Layer circle w4.4: c0,0 r2.2
  silkscreen extent -4,-4 4,4
MH_M3_2 [mm] "Mounting Hole"
  round 3.5 hole 3.4: 0(0,0)
  Keep-Out Layer circle w4: c0,0 r2
  silkscreen extent -4,-4 4,4
MOLEX_22-29-2021 [mm] "Connector - PCB; Header; SQ Pin, 2 way; 2.54mm; Vert"
  rect 1.6x1.6 hole 1: 1(-1.27,0)
  round 1.6 hole 1: 2(1.27,0)
  silkscreen extent -3,-3 3,3
MOLEX_95022-2667 [mm] "Connector; PCB Jack, Thru-Hole; 1-Port, 6 Positions, 6 Loaded; Unshielded without Lightpipes; Vertical"
  rect 1.6x1.6 hole 1: 1(-3.175,4.445)
  round 1.6 hole 1: 2(-1.905,1.905) 3(-0.635,4.445) 4(0.635,1.905) 5(1.905,4.445) 6(3.175,1.905)
  round 2.95 hole 3.25 unplated: MH1(-5.08,-4.445) MH2(5.08,-4.445)
  silkscreen extent -6.65,-3.17 6.65,5.84
phoenix-contact_smkdsn-5.08 [mm] "Terminal Block 3x5.08"
  round 2.54 hole 1.3: 1(-5.08,0) 2(0,0) 3(5.08,0)
  silkscreen extent -8.12,-6 8.14,6
QFN50P500X500X100-28M [mm] "QFN, 28-Leads, Body 5,2x5,2mm (max), Pitch 0,50mm, IPC Low Density"
  oval 1.15x0.25 smd: 1(-2.525,1.5) 2(-2.525,1) 3(-2.525,0.5) 4(-2.525,0) 5(-2.525,-0.5) 6(-2.525,-1) 7(-2.525,-1.5) 15(2.525,-1.5) 16(2.525,-1) 17(2.525,-0.5) 18(2.525,0) 19(2.525,0.5) 20(2.525,1) 21(2.525,1.5)
  oval 0.25x1.15 smd: 8(-1.5,-2.525) 9(-1,-2.525) 10(-0.5,-2.525) 11(0,-2.525) 12(0.5,-2.525) 13(1,-2.525) 14(1.5,-2.525) 22(1.5,2.525) 23(1,2.525) 24(0.5,2.525) 25(0,2.525) 26(-0.5,2.525) 27(-1,2.525) 28(-1.5,2.525)
  rect 2.5x2.5 smd: 29(0,0)
  rect 2.5x2.5 smd far side: 29(0,0)
  silkscreen extent -3.62,-2.6 2.6,2.61, body extent -2.58,-2.57 2.57,2.58, height 1
RESC1608M [mm] "Chip Resistor, Body 1.6x0.8mm, IPC Low Density"
  rect 1.1x1.1 smd: 1(-0.95,0) 2(0.95,0)
  silkscreen extent -0.2,-0.45 0.2,0.45, body extent -0.85,-0.48 0.85,0.48, height 0.6
RESC2012L [mm] "Chip Resistor, Body 2.0x1.3mm, IPC High Density"
  rect 1x1.3 smd: 1(-0.8,0) 2(0.8,0)
  silkscreen extent 0,-0.55 0,0.55, body extent -1.07,-0.7 1.07,0.7, height 0.65
RESC3216M [mm] "Chip Resistor, Body 3.2x1.6mm, IPC Low Density"
  rect 1.5x1.9 smd: 1(-1.55,0) 2(1.55,0)
  silkscreen extent -0.4,-0.85 0.4,0.85, body extent -1.68,-0.87 1.68,0.87, height 0.71
SMA [mm]
  rect 2.5x1.7 smd: 1(-2,0) 2(2,0)
  silkscreen extent -0.6,-1.2 0.6,1.2, body extent -1.65,-0.85 1.65,0.85, height 1.2
SMB [mm]
  rect 2.5x1.7 smd: 1(-2,0) 2(2,0)
  silkscreen extent -0.6,-1.2 0.6,1.2, body extent -2.8,-1.97 2.8,1.97, height 2.45
SOD323 [mm] "SOD-323/SC-76; 2 Leads; Body 1.7 x 1.3 mm, (LxW)"
  rect 1.45x0.55 smd: 1(-1.175,0) 2(1.175,0)
  silkscreen extent -0.95,-0.75 0.95,0.75
SOIC127P600-8M [mm] "SOIC, 8-Leads, Body 4.9x3.9mm, Pitch 1.27mm, IPC Low Density"
  oval 2.5x0.7 smd: 1(-2.45,1.905) 2(-2.45,0.635) 3(-2.45,-0.635) 4(-2.45,-1.905) 5(2.45,-1.905) 6(2.45,-0.635) 7(2.45,0.635) 8(2.45,1.905)
  silkscreen extent -2.58,-2.5 0.8,2.93, body extent -2,-2.5 2,2.5, height 1.75
SOT23-3M [mm] "SOT23, 3-Leads, Body 2.9x1.3mm, Pitch 0.95mm, Lead Span 2.5mm, IPC Low Density"
  rect 1.8x0.6 smd: 1(-1,0.95) 2(-1,-0.95) 3(1,0)
  silkscreen extent -1.13,-1.5 0.7,1.92, body extent -0.7,-1.5 0.7,1.5, height 1.1
SOT223-4M [mm] "SOT223, 4-Leads, Body 6.5x3.5mm, Pitch 2.3mm, Lead Span 7mm, IPC Low Density"
  rect 2.7x1 smd: 1(-2.95,2.3) 2(-2.95,0) 3(-2.95,-2.3)
  rect 2.7x3.3 smd: 2(2.95,0)
  silkscreen extent -3.07,-3.35 1.3,3.47, body extent -1.85,-3.35 1.85,3.35, height 1.8
SOT323-3AM [mm] "SOT323, 3-Leads, Body 2.0x1.3mm, Pitch 0.65mm, Lead Span 2.1mm, IPC Low Density"
  rect 1.5x0.5 smd: 1(-1,0.65) 2(-1,-0.65) 3(1,0)
  silkscreen extent -1.25,-1.1 0.7,1.52, body extent -0.7,-1.1 0.7,1.1, height 1
SW_FSM6JSMA [mm]
  rect 2.1x1.4 smd: 1(-4.55,2.25)
  oval 2.1x1.4 smd: 2(4.55,2.25) 3(-4.55,-2.25) 4(4.55,-2.25)
  silkscreen extent -2.66,-3.65 2.95,3.55
TDK_PS17 [mm]
  round 1.6 hole 1: 1(0,0) 2(10,0)
  silkscreen extent -4,-9 14,9
TRIMMER_14 [mm]
  round 1.4 hole 0.8: 1(-2.54,0) 2(0,-2.54) 3(2.54,0)
  silkscreen extent -3.3,-3.47 3.3,3.56
TSQFP50P1400X1400X160-80M [mm] "TSQFP, 80-Leads, Body 14,1x14,1mm (max), Pitch 0,50mm, IPC Low Density"
  oval 2.05x0.25 smd: 1(-6.625,4.75) 2(-6.625,4.25) 3(-6.625,3.75) 4(-6.625,3.25) 5(-6.625,2.75) 6(-6.625,2.25) 7(-6.625,1.75) 8(-6.625,1.25) 9(-6.625,0.75) 10(-6.625,0.25) 11(-6.625,-0.25) 12(-6.625,-0.75) 13(-6.625,-1.25) 14(-6.625,-1.75) 15(-6.625,-2.25) 16(-6.625,-2.75) 17(-6.625,-3.25) 18(-6.625,-3.75) 19(-6.625,-4.25) 20(-6.625,-4.75) 41(6.625,-4.75) 42(6.625,-4.25) 43(6.625,-3.75) 44(6.625,-3.25) 45(6.625,-2.75) 46(6.625,-2.25) 47(6.625,-1.75) 48(6.625,-1.25) 49(6.625,-0.75) 50(6.625,-0.25) 51(6.625,0.25) 52(6.625,0.75) 53(6.625,1.25) 54(6.625,1.75) 55(6.625,2.25) 56(6.625,2.75) 57(6.625,3.25) 58(6.625,3.75) 59(6.625,4.25) 60(6.625,4.75)
  oval 0.25x2.05 smd: 21(-4.75,-6.625) 22(-4.25,-6.625) 23(-3.75,-6.625) 24(-3.25,-6.625) 25(-2.75,-6.625) 26(-2.25,-6.625) 27(-1.75,-6.625) 28(-1.25,-6.625) 29(-0.75,-6.625) 30(-0.25,-6.625) 31(0.25,-6.625) 32(0.75,-6.625) 33(1.25,-6.625) 34(1.75,-6.625) 35(2.25,-6.625) 36(2.75,-6.625) 37(3.25,-6.625) 38(3.75,-6.625) 39(4.25,-6.625) 40(4.75,-6.625) 61(4.75,6.625) 62(4.25,6.625) 63(3.75,6.625) 64(3.25,6.625) 65(2.75,6.625) 66(2.25,6.625) 67(1.75,6.625) 68(1.25,6.625) 69(0.75,6.625) 70(0.25,6.625) 71(-0.25,6.625) 72(-0.75,6.625) 73(-1.25,6.625) 74(-1.75,6.625) 75(-2.25,6.625) 76(-2.75,6.625) 77(-3.25,6.625) 78(-3.75,6.625) 79(-4.25,6.625) 80(-4.75,6.625)
  silkscreen extent -6.75,-5.2 5.2,5.57, body extent -6,-6 6,6, height 1.6
USB2.5-2H4D [mm] "Connector; USB1.1, Type B, Thru-Hole; 4 Position; Right Angle"
  rect 1.6x1.6 hole 1: 1(-1,1.25)
  round 1.6 hole 1: 2(-1,-1.25) 3(1,-1.25) 4(1,1.25)
  round 3.8 hole 2.3: 5(3.71,6.02) 6(3.71,-6.02)
  silkscreen extent -3.18,-6.02 13.99,6.02, body extent -2.41,-6.02 13.99,6.02, height 11.1
WEIDMULLER_SL-5.08-02-90B [mm]
  round 2.54 hole 1.3: 1(-2.54,0) 2(2.54,0)
  silkscreen extent -5.08,-9.9 5.08,2.1
WEIDMULLER_SL-5.08-04-90B [mm]
  round 2.54 hole 1.3: 1(-7.62,0) 2(-2.54,0) 3(2.54,0) 4(7.62,0)
  silkscreen extent -11.16,-10 11.16,2
XTAL_800P380X250-4M [mm] "XTAL, 4-Leads, Body 8,0x3,8mm (max), Pitch 5,50mm, IPC Low Density"
  rrect50% 2x1.3 smd: 1(-1.65,2.75) 2(-1.65,-2.75) 3(1.65,-2.75) 4(1.65,2.75)
  silkscreen extent -2.74,-4 2.5,4.47, body extent -1.9,-4 1.9,4, height 2.5

## Part data
C1 C3 C5 C7 C8 C9 C10 C13 C14 C17 C18 C19 C21 C23 C25 C26 C28 C29 C30 C32 C35 C36 C37 C39 C43 C44 C45 C46 C47 C48 C59 C60 C62 C69: library part 10000054, "Capacitor - MLCC; 0603; NP0; 50V"
C2 C20: library part 10000054, "Capacitor Non Polarized"
C4 C6 C22 C24 C38 C40: library part 10000001, "Capacitor - MLCC; 0805; Y5V; 10UF; 6.3V"
C11 C12 C27 C31: library part 10000069, "Capacitor - Al. Electrolytic; 100UF; 50V"
C15 C16 C33 C34: library part 10000059, "Capacitor - MLCC; 0603; NP0; 50V"
C41 C64: library part 10000002, "Capacitor - MLCC; 10uF; 35V;"
C49 C52 C55 C56: library part 10000056, "Capacitor - MLCC; 0603; NP0; 50V"
C50 C53: library part 10000058, "Capacitor - MLCC; 0603; NP0; 50V"
C51 C54: library part 10000057, "Capacitor - MLCC; 0603; NP0; 50V"
C57: library part 10000005, "Capacitor - MLCC Y5V; 47UF; 6.3V"
C58 C63: library part 10000086, "Capacitor - Al. Electrolytic; 100uF, 16V"
C61: library part 10000066, "Capacitor - MLCC; 0603; NP0; 50V"
C65 C66: library part 10000006, "Capacitor - Al. Electrolytic; 2200uF; 35V"
C67: library part 10000055, "Capacitor - MLCC; 0603; NP0; 50V"
D1 D4 D7: library part 10000008, "Led - 1206; Green OSRAM"
D2 D3 D5 D6 D8 D9: library part 10000089, "Led - 1206; Red"
D10: library part 10000065, "Led - 1206; Blue OSRAM"
D11 D15 D16: library part 10000010, "Diode - Schottky; 1.5A; 60V"
D12: library part 10000009, "Diode - Schottky; 25V; 2A"
D13: library part 10000007, "Led - 1206; Orange OSRAM"
D17 D18: library part 10000088, "Diode - Zener; 0.4W; 12V"
D19 D20: library part 10000085, "Diode - Schottky; 30V; 1A;"
F1: library part 10000011, "Fuse - 0603; Itrip=3.15A"
HS1 HS2 HS3 HS4: library part 10000090, "Heat Sink - IC stiker"
HS5: library part 10000091, "Heat Sink - For D2PAK"
J1 J2 J4 J5 J7 J8: library part 10000023, "Connector - Header male; Screw; 4way; Hor."
J3 J6 J9: library part 10000062, "Connector - PCB; RJ11; 6/4 Low Profile; Hor."
J10: library part 10000029, "Connector - MicroSD Card 8pin; PCB; Gold"
J11: library part 10000073, "Connector - USB; Type B; Hor;"
J12 J13 J14 J15: library part 10000093
J17: library part 10000095
J18 J20: library part 10000067, "Connector - Header 15x1"
J19: library part 10000074, "Connector - Header 1x6; Hor."
J21 J24: library part 10000097, "Connector - PCB; Header; SQ Pin, 2 way; 2.54mm; Vert"
J22: library part 10000064, "Connector - PCB; Male Receptacle; 2.54mm; 2way; Vert."
J23: library part 10000026, "Connector - Header male; Screw; 2way; Hor."
L1 L2 L3 L4 L5 L6 L7 L8 L9 L10 L11 L12: library part 10000032, "Ferrite Bead - 470OHM; 0603"
L13: library part 10000081, "Inductor - 33uH; Isat=2.9A; In=1.5A"
LS1: library part 10000068, "Buzzer - Piezo; 70dB; Diam.17mm"
MH1 MH2 MH3 MH4: library part 1000000, "PCB Symbol - Mounting Hole M3"
MH5 MH6: library part 100001, "PCB Symbol - Mounting Hole M3"
P1 P2 P3 P4: library part 10000092, "Resistor - Trimmer; 1/4\"; 10K"
Q1 Q2 Q3 Q4 Q8 Q10 Q12 Q13: library part 10000039, "Mosfet - N; 60V; 0.3A;"
Q5 Q6: library part 10000078, "N-channel Enhancement Mode Field-effect Transistor (123/gds)"
Q7 Q9 Q11: library part MOS-P, "P-Channel Power MOSFET"
R1 R2 R3 R6 R7 R8 R9 R12 R26 R27 R30 R31 R32 R33 R35 R36 R37 R38 R41 R55 R57 R64 R70 R71 R72 R75 R76 R77 R83 R86 R89 R92 R94 R97 R104 R115: library part 10000044, "Resistor - 0603; 0.063W; 1%"
R4: library part 10000048, "Resistor"
R5 R44 R96 R103: library part 10000096, "Resistor - 0603; 0.063W; 1%"
R10 R59: library part 10000044, "Resistor"
R11 R62 R68 R69 R107: library part 10000042, "Resistor - 0603; 0.063W; 1%"
R13 R16 R17 R42 R45 R46 R61: library part 10000041, "Resistor - 0603; 0.063W; 1%"
R15 R100: library part 10000049, "Resistor - 0603; 0.063W; 1%"
R18 R19 R47 R48: library part 10000087, "Resistor - 0603; 0.063W; 1%"
R20 R21 R22 R23 R49 R50 R51 R52: library part 10000047, "Resistor - 1206; 0.5W; 1%"
R24 R25 R28 R29 R53 R54 R56 R58 R63 R65 R74 R99: library part 10000045, "Resistor - 0603; 0.063W; 1%"
R34 R39 R40 R73 R78 R79 R80 R81 R82 R108 R109 R110 R111 R112 R113 R114: library part 10000098, "Resistor - 0805; 0.100W; 5%"
R43 R84 R85 R87 R106: library part 10000048, "Resistor - 0603; 0.063W; 1%"
R60: library part 10000041, "Resistor"
R66 R67 R95: library part 10000050, "Resistor - 0603; 0.063W; 1%"
R90 R91: library part 10000053, "Resistor - 0603; 0.063W; 1%"
R93 R98: library part 10000061, "Resistor - 0603; 0.063W; 1%"
R101: library part 10000080, "Resistor - 0603; 0.063W; 1%"
R102: library part 10000079, "Resistor - 0603; 0.063W; 1%"
S1 S2: library part 10000019, "Switch - Micro; Tactile; SPNO"
U1 U2 U3 U4: library part 10000094, "A4988 (A4983 pinout compatible)"
U5: library part 10000013, "IC - uController ARM Cortex-M3, 100MHz"
U6: library part 10000017, "IC - DC-DC Reg."
U10: library part 10000082, "IC - Fixed LDO Voltage Reg 3.3V 800mA"
X1: library part 10000063, "Crystal - 32.768 kHz Low Profile; PLastic"
X2: library part 10000040, "Crystal - 12.0MHz"

## Via types
v1: diameter 1, hole 0.4, Top Layer to Bottom Layer, 252 vias
v2: diameter 1.2, hole 0.6, Top Layer to Bottom Layer, 59 vias
v3: diameter 1, hole 0.4, Top Layer to Bottom Layer, tented top, 36 vias
v4: diameter 1.6, hole 0.6, Top Layer to Bottom Layer, 27 vias
v5: diameter 1.6, hole 1, Top Layer to Bottom Layer, 2 vias

## Nets (pads, with @x,y where several pads share a name; then routed paths per layer and width w, separated by ;. In a path a pad name is that pad's centre, name@x,y a point inside that pad or via, vN(x,y) a via of type N, cw(c..) or ccw(c..) an arc to the next point about the centre after c; other vN are vias at no path point)
*BUSB: C59.2 R4.1 S1.3 S1.4 U5.68 | length 119
  Top Layer w0.25: S1.3@40.02,108.88 43.5,105.4 87.043,105.4 89.643,102.8 97.8,102.8 v1(98,103) 98.3,103.3 115.4,103.3 R4.1@115.6,103.1 ; U5.68@97.182,84.101 97.182,91.405 98.565,92.788 98.565,93.5 ; v1(98.16,94.8) 98.565,94.395 98.565,93.5 ; 98.565,93.865 98.565,93.5
  Top Layer w0.5: v1(36.7,105.2) 36.7,107.3 38.288,108.888 40.02,108.888 S1.3@40.02,108.88 ; v1(36.8,99.8) 36.812,99.788 v1@36.82,99.788 ; C59.2@36.82,94.388 v1@36.82,99.788 ; S1.4@40.02,99.788 v1@36.82,99.788
  Bottom Layer w0.25: v1(98,103) 98.55,102.45 98.55,95.19 v1(98.16,94.8)
  Bottom Layer w0.5: v1(36.7,105.2) 36.7,99.908 v1@36.82,99.788
*RST: C60.2 J22.15 R74.1 S2.3 S2.4 U5.14 | length 118.5
  Top Layer w0.25: S2.4@40.02,88.036 41.435,86.621 46.441,86.621 46.52,86.7 ; 45.3,81.22 46.52,82.44 46.52,86.7 ; v1(88.75,99.5) 88.75,99.973 85.823,102.9 50.975,102.9 50.025,101.95 50.037,101.937 46.52,98.42 46.52,86.7 ; v1(88.82,85.888) 88.82,84.488 91.62,81.688 91.62,76.188 91.158,75.726 U5.14@89.307,75.726
  Top Layer w0.3: R74.1@36.2,86.158 36.2,87.468 36.768,88.036 40.02,88.036 S2.3@40.02,97.136 ; J22.15@43.33,76.068 44.15,76.068 45.3,77.218 45.3,81.22
  Bottom Layer w0.25: v1(88.75,99.5) 88.755,99.495 88.755,85.953 v1(88.82,85.888)
*TRST: J22.3 R72.2 U5.4 | length 107.8
  Top Layer w0.25: R72.2@36.32,61.048 37.78,59.588 42.09,59.588 45.052,62.55 45.052,70.4 45.028,70.424 45.028,74.028 49.12,78.12 49.12,98.148 51.912,100.94 84.26,100.94 85.125,100.075 v1(85.125,99.525) ; v1(85.12,85.888) 85.12,82.687 87.071,80.736 89.297,80.736 U5.4@89.307,80.726
  Bottom Layer w0.25: v1(85.12,85.888) 85.12,99.52 v1(85.125,99.525)
*USB_PPWR: J18.1 U5.26 | length 62.7
  Top Layer w0.25: v1(52.4,54.7) 52.5,54.7 53,55.2 71.981,55.2 73.491,56.71 90.703,56.71 93.678,59.685 93.678,70.847 U5.26@93.682,70.851
  Bottom Layer w0.25: J18.1@51.82,62.588 51.8,62.588 52.3,62.088 52.3,54.8 v1(52.4,54.7)
CTC1_NTC1: J8.1 L2.2 | length 40.5
  Top Layer w0.25: J8.1@117.86,6.708 115.2,9.368 115.2,41.8 117.2,43.8 L2.2@118.7,43.8
CTC1_NTC2: J8.2 L4.2 | length 47.1
  Top Layer w0.25: 121.1,6.708 115.8,12.008 115.8,41.5 116.7,42.4 121.9,42.4 L4.2@122.8,43.3
  Top Layer w0.3: 121.1,6.708 J8.2@122.94,6.708 ; L4.2@122.8,43.3 L4.2@122.8,43.8
CTC2_NTC1: J7.1 L1.2 | length 39.6
  Top Layer w0.25: 138.9,9.6 138.9,33.8 ; 138.9,34 138.9,33.8 ; L1.2@141.12,43.8 140.1,43.8 138.9,42.6 138.9,33.8
  Top Layer w0.3: 138.9,9.6 138.9,8.528 J7.1@140.72,6.708
CTC2_NTC2: J7.2 L3.2 | length 45.6
  Top Layer w0.25: 145.22,43.22 144.5,42.5 140.3,42.5 139.5,41.7 139.5,11.208 144,6.708 J7.2@145.8,6.708
  Top Layer w0.3: 145.22,43.22 L3.2@145.22,43.8
DBG_RXD: J19.4 R4.2 | length 10.9
  Top Layer w0.25: R4.2@117.55,103.1 117.85,102.8 125.3,102.8 126.4,101.7 J19.4@126.4,100.2